# EAGLE board PCBPlates v76 (EAGLE 9.7.0)
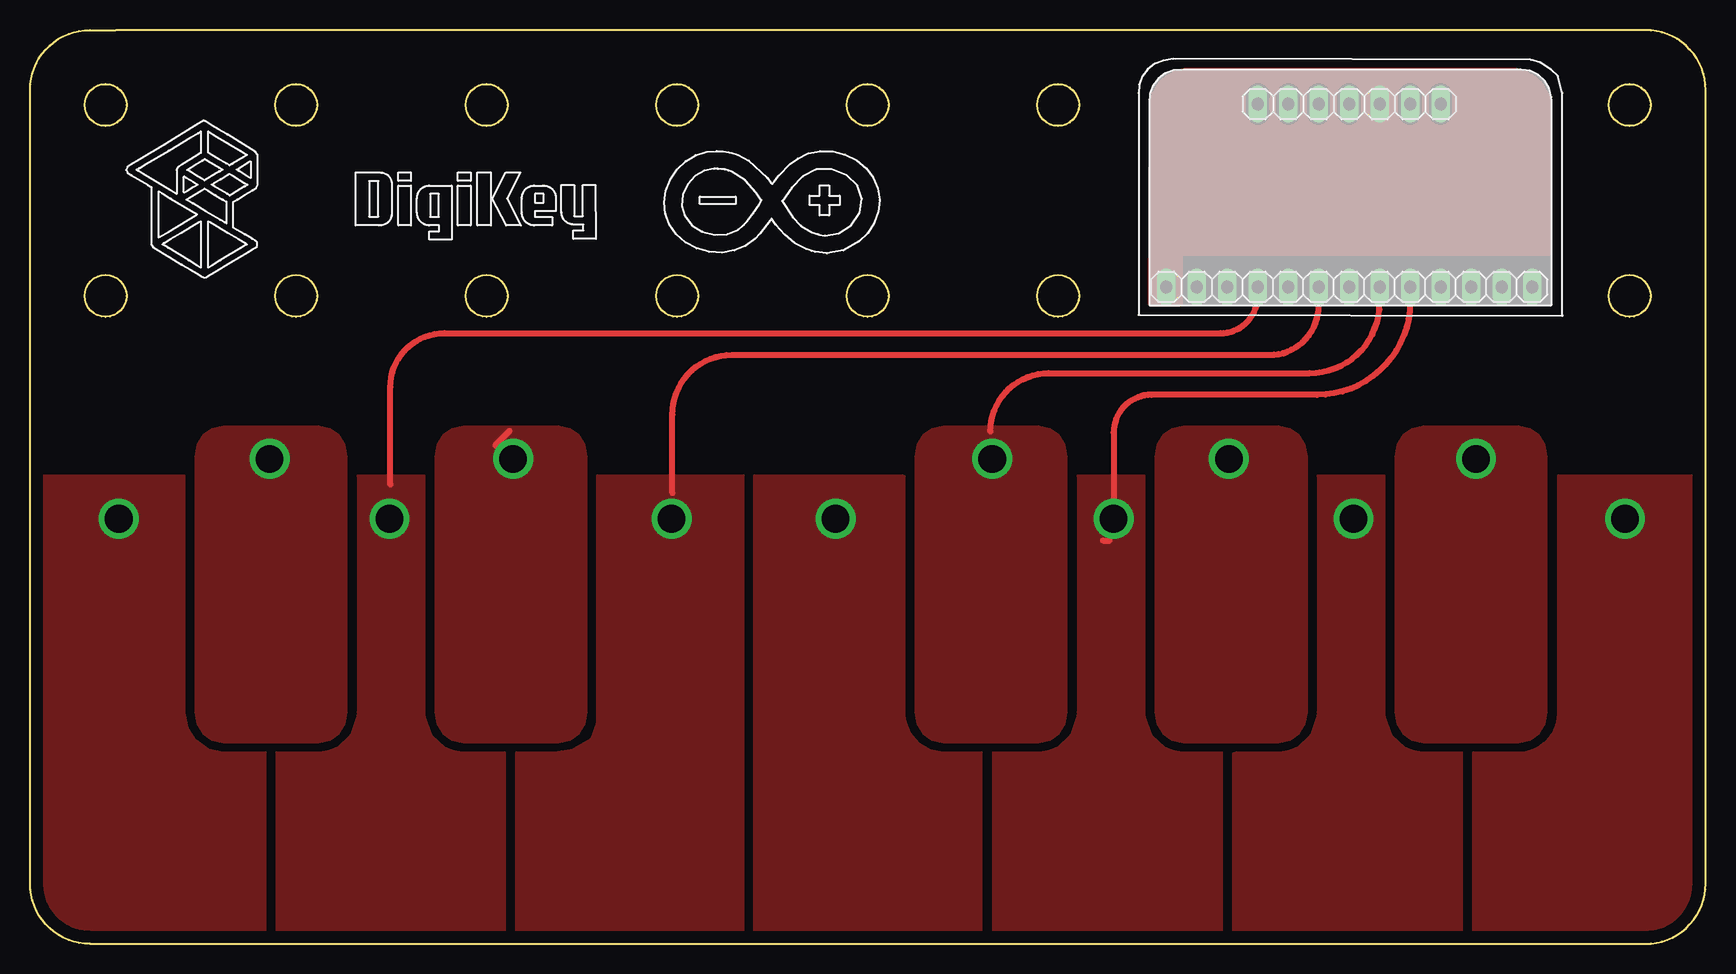
[diagram p0: board, top side]
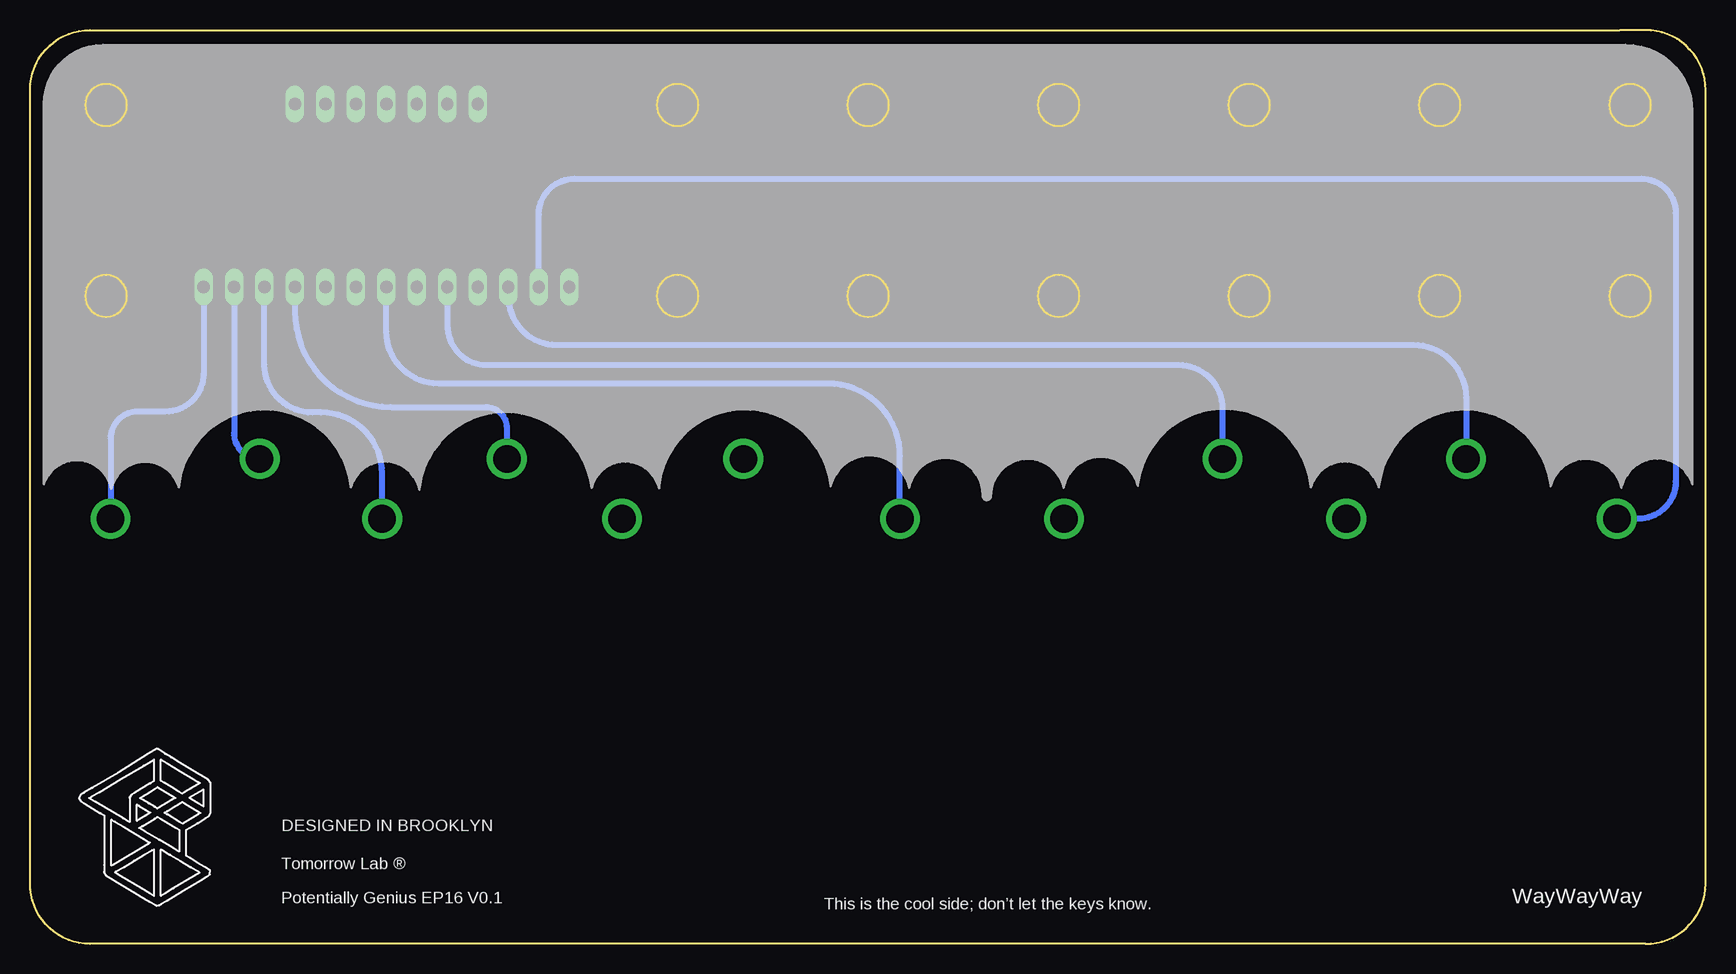
[diagram p1: board, bottom side, seen from below]

Size 139.64 x 76.15 mm. Coordinates in mm from the lower left corner, seen from the top.
Outline: 6.3,52.25 5.95,52.29 5.62,52.39 5.32,52.55 5.07,52.76 4.85,53.02 4.69,53.32 4.59,53.65 4.55,54 4.59,54.35 4.69,54.68 4.85,54.97 5.07,55.23 5.32,55.44 5.62,55.61 5.95,55.71 6.3,55.74 6.65,55.71 6.98,55.61 7.28,55.44 7.53,55.23 7.75,54.97 7.91,54.68 8.01,54.35 8.05,54 8.01,53.65 7.91,53.32 7.75,53.02 7.53,52.76 7.28,52.55 6.98,52.39 6.65,52.29 6.3,52.25
Outline: 6.3,68.16 5.95,68.19 5.62,68.29 5.32,68.46 5.07,68.67 4.85,68.93 4.69,69.22 4.59,69.55 4.55,69.9 4.59,70.26 4.69,70.58 4.85,70.88 5.07,71.14 5.32,71.35 5.62,71.51 5.95,71.61 6.3,71.65 6.65,71.61 6.98,71.51 7.28,71.35 7.53,71.14 7.75,70.88 7.91,70.58 8.01,70.26 8.05,69.9 8.01,69.55 7.91,69.22 7.75,68.93 7.53,68.67 7.28,68.46 6.98,68.29 6.65,68.19 6.3,68.16
Outline: 22.17,52.25 21.82,52.29 21.5,52.39 21.2,52.55 20.94,52.76 20.73,53.02 20.57,53.32 20.46,53.65 20.43,54 20.46,54.35 20.57,54.68 20.73,54.97 20.94,55.23 21.2,55.44 21.5,55.61 21.82,55.71 22.17,55.74 22.53,55.71 22.85,55.61 23.15,55.44 23.41,55.23 23.62,54.97 23.78,54.68 23.89,54.35 23.92,54 23.89,53.65 23.78,53.32 23.62,53.02 23.41,52.76 23.15,52.55 22.85,52.39 22.53,52.29 22.17,52.25
Outline: 22.17,68.16 21.82,68.19 21.5,68.29 21.2,68.46 20.94,68.67 20.73,68.93 20.57,69.22 20.46,69.55 20.43,69.9 20.46,70.26 20.57,70.58 20.73,70.88 20.94,71.14 21.2,71.35 21.5,71.51 21.82,71.61 22.17,71.65 22.53,71.61 22.85,71.51 23.15,71.35 23.41,71.14 23.62,70.88 23.78,70.58 23.89,70.26 23.92,69.9 23.89,69.55 23.78,69.22 23.62,68.93 23.41,68.67 23.15,68.46 22.85,68.29 22.53,68.19 22.17,68.16
Outline: 38.05,52.25 37.7,52.29 37.37,52.39 37.07,52.55 36.82,52.76 36.6,53.02 36.44,53.32 36.34,53.65 36.3,54 36.34,54.35 36.44,54.68 36.6,54.97 36.82,55.23 37.07,55.44 37.37,55.61 37.7,55.71 38.05,55.74 38.4,55.71 38.73,55.61 39.03,55.44 39.28,55.23 39.5,54.97 39.66,54.68 39.76,54.35 39.8,54 39.76,53.65 39.66,53.32 39.5,53.02 39.28,52.76 39.03,52.55 38.73,52.39 38.4,52.29 38.05,52.25
Outline: 38.05,68.16 37.7,68.19 37.37,68.29 37.07,68.46 36.82,68.67 36.6,68.93 36.44,69.22 36.34,69.55 36.3,69.9 36.34,70.26 36.44,70.58 36.6,70.88 36.82,71.14 37.07,71.35 37.37,71.51 37.7,71.61 38.05,71.65 38.4,71.61 38.73,71.51 39.03,71.35 39.28,71.14 39.5,70.88 39.66,70.58 39.76,70.26 39.8,69.9 39.76,69.55 39.66,69.22 39.5,68.93 39.28,68.67 39.03,68.46 38.73,68.29 38.4,68.19 38.05,68.16
Outline: 53.92,52.25 53.57,52.29 53.25,52.39 52.95,52.55 52.69,52.76 52.48,53.02 52.32,53.32 52.21,53.65 52.18,54 52.21,54.35 52.32,54.68 52.48,54.97 52.69,55.23 52.95,55.44 53.25,55.61 53.57,55.71 53.92,55.74 54.28,55.71 54.6,55.61 54.9,55.44 55.16,55.23 55.37,54.97 55.53,54.68 55.64,54.35 55.67,54 55.64,53.65 55.53,53.32 55.37,53.02 55.16,52.76 54.9,52.55 54.6,52.39 54.28,52.29 53.92,52.25
Outline: 53.92,68.16 53.57,68.19 53.25,68.29 52.95,68.46 52.69,68.67 52.48,68.93 52.32,69.22 52.21,69.55 52.18,69.9 52.21,70.26 52.32,70.58 52.48,70.88 52.69,71.14 52.95,71.35 53.25,71.51 53.57,71.61 53.92,71.65 54.28,71.61 54.6,71.51 54.9,71.35 55.16,71.14 55.37,70.88 55.53,70.58 55.64,70.26 55.67,69.9 55.64,69.55 55.53,69.22 55.37,68.93 55.16,68.67 54.9,68.46 54.6,68.29 54.28,68.19 53.92,68.16
Outline: 69.8,52.25 69.45,52.29 69.12,52.39 68.82,52.55 68.57,52.76 68.35,53.02 68.19,53.32 68.09,53.65 68.05,54 68.09,54.35 68.19,54.68 68.35,54.97 68.57,55.23 68.82,55.44 69.12,55.61 69.45,55.71 69.8,55.74 70.15,55.71 70.48,55.61 70.78,55.44 71.03,55.23 71.25,54.97 71.41,54.68 71.51,54.35 71.55,54 71.51,53.65 71.41,53.32 71.25,53.02 71.03,52.76 70.78,52.55 70.48,52.39 70.15,52.29 69.8,52.25
Outline: 69.8,68.16 69.45,68.19 69.12,68.29 68.82,68.46 68.57,68.67 68.35,68.93 68.19,69.22 68.09,69.55 68.05,69.9 68.09,70.26 68.19,70.58 68.35,70.88 68.57,71.14 68.82,71.35 69.12,71.51 69.45,71.61 69.8,71.65 70.15,71.61 70.48,71.51 70.78,71.35 71.03,71.14 71.25,70.88 71.41,70.58 71.51,70.26 71.55,69.9 71.51,69.55 71.41,69.22 71.25,68.93 71.03,68.67 70.78,68.46 70.48,68.29 70.15,68.19 69.8,68.16
Outline: 85.67,52.25 85.32,52.29 85,52.39 84.7,52.55 84.44,52.76 84.23,53.02 84.07,53.32 83.96,53.65 83.93,54 83.96,54.35 84.07,54.68 84.23,54.97 84.44,55.23 84.7,55.44 85,55.61 85.32,55.71 85.67,55.74 86.03,55.71 86.35,55.61 86.65,55.44 86.91,55.23 87.12,54.97 87.28,54.68 87.39,54.35 87.42,54 87.39,53.65 87.28,53.32 87.12,53.02 86.91,52.76 86.65,52.55 86.35,52.39 86.03,52.29 85.67,52.25
Outline: 85.67,68.16 85.32,68.19 85,68.29 84.7,68.46 84.44,68.67 84.23,68.93 84.07,69.22 83.96,69.55 83.93,69.9 83.96,70.26 84.07,70.58 84.23,70.88 84.44,71.14 84.7,71.35 85,71.51 85.32,71.61 85.67,71.65 86.03,71.61 86.35,71.51 86.65,71.35 86.91,71.14 87.12,70.88 87.28,70.58 87.39,70.26 87.42,69.9 87.39,69.55 87.28,69.22 87.12,68.93 86.91,68.67 86.65,68.46 86.35,68.29 86.03,68.19 85.67,68.16
Outline: 133.3,52.25 132.95,52.29 132.62,52.39 132.32,52.55 132.07,52.76 131.85,53.02 131.69,53.32 131.59,53.65 131.55,54 131.59,54.35 131.69,54.68 131.85,54.97 132.07,55.23 132.32,55.44 132.62,55.61 132.95,55.71 133.3,55.74 133.65,55.71 133.98,55.61 134.28,55.44 134.53,55.23 134.75,54.97 134.91,54.68 135.01,54.35 135.05,54 135.01,53.65 134.91,53.32 134.75,53.02 134.53,52.76 134.28,52.55 133.98,52.39 133.65,52.29 133.3,52.25
Outline: 133.3,68.16 132.95,68.19 132.62,68.29 132.32,68.46 132.07,68.67 131.85,68.93 131.69,69.22 131.59,69.55 131.55,69.9 131.59,70.26 131.69,70.58 131.85,70.88 132.07,71.14 132.32,71.35 132.62,71.51 132.95,71.61 133.3,71.65 133.65,71.61 133.98,71.51 134.28,71.35 134.53,71.14 134.75,70.88 134.91,70.58 135.01,70.26 135.05,69.9 135.01,69.55 134.91,69.22 134.75,68.93 134.53,68.67 134.28,68.46 133.98,68.29 133.65,68.19 133.3,68.16
Outline: 5,0 134.64,0 arc90 139.64,5 139.64,71.15 arc90 134.64,76.15 7.15,76.15 5,76.15 arc90 0,71.15 0,5 arc90 5,0
Copper layers (1*16): Top 0.035mm / dielectric 1.5mm / Bottom 0.035mm
Design rules "Fusion Electronics Design Rules": minimum track width 20mil, minimum drill 0.35mm, track to track 8mil, track to pad 8mil, pad to pad 8mil, via to via 8mil, smd to smd 8mil, copper to edge 40mil, drill to drill 6mil, minimum pad ring 10mil, minimum via ring 8mil, stop-mask expansion 4mil, vias tented up to drill 0mil, thermal gap 10mil

## Footprints (pad centres in the part's own frame; a part is rotated, then mirrored left to right if it is on the bottom)
1X13 = drill 1.016 long: 1 -15.24,0; 2 -12.7,0; 3 -10.16,0; 4 -7.62,0; 5 -5.08,0; 6 -2.54,0; 7 0,0; 8 2.54,0; 9 5.08,0; 10 7.62,0; 11 10.16,0; 12 12.7,0; 13 15.24,0
1X07 = drill 1.016 long: 1 -7.62,0; 2 -5.08,0; 3 -2.54,0; 4 0,0; 5 2.54,0; 6 5.08,0; 7 7.62,0

## Placement (x,y rotation side)
JP1  PINHD-1X13  [1X13]  109.93,54.74 180 top
JP2  PINHD-1X7  [1X07]  109.93,69.98 0 top

## Library data of the parts
JP1 JP2 = Connector; CATEGORY: CONNECTOR; SUB-CATEGORY: PIN-HEADER

## Nets
GND: JP1.13 JP2.5
KEY0: JP1.12
KEY1: JP1.11
KEY2: JP1.10
KEY3: JP1.9
KEY4: JP1.8
KEY5: JP1.7
KEY6: JP1.6
KEY7: JP1.5
KEY8: JP1.4
KEY9: JP1.3
KEY10: JP1.2
KEY11: JP1.1

## Tracks (layer width: path | path; a pad name or v marks a point on that pad's centre or on a via)
GND
  pour Top (no thermals): 93.37,53.35 95.84,53.35 95.84,57.38 95.88,57.48 95.95,57.55 96.04,57.59 126.6,57.59 126.6,69.54 126.56,70.01 126.47,70.46 126.31,70.89 126.08,71.29 125.81,71.66 125.48,71.99 125.12,72.26 124.71,72.48 124.28,72.65 123.83,72.74 123.36,72.78 96.71,72.78 96.24,72.74 95.78,72.64 95.34,72.48 94.93,72.26 94.56,71.98 94.23,71.65 93.95,71.27 93.72,70.86 93.56,70.42 93.46,69.97 93.42,69.49 93.42,68.64 93.43,68.64 93.42,68.58 93.42,68.53 93.42,68.53
KEY0  (via drill 2.3)
  Bottom 0.508: JP1.12 97.24,60.79 arc90 94.26,63.76 5.34,63.76 arc90 2.49,60.91 2.49,38.54 arc90 5.6,35.43 v7.4,35.43
  pour Top: 6.3,0.08 19.65,0.08 19.65,15.93 16.1,15.93 16.1,15.93 16.09,15.93 16.08,15.93 16.07,15.93 14.88,16.19 14.88,16.19 14.86,16.19 14.85,16.19 14.85,16.19 14.85,16.19 14.83,16.2 14.82,16.21 14.82,16.21 13.84,16.91 13.83,16.91 13.83,16.91 13.82,16.91 13.82,16.93 13.14,17.97 13.14,17.98 13.14,17.98 13.14,17.98 13.13,18 12.89,19.27 12.89,19.27 12.89,19.28 12.88,19.29 12.89,19.3 12.89,39.02 0.01,39.02 0.01,6.37 0.14,5.1 0.51,3.92 1.09,2.85 1.85,1.92 2.78,1.15 3.85,0.57 5.03,0.2
KEY1  (via drill 2.3)
  Bottom 0.508: JP1.11 99.78,53.93 arc-90 95.76,49.92 24.36,49.92 arc90 19.97,45.52 v19.97,40.42
  pour Top: 16.11,16.8 24.08,16.8 24.99,17 25.73,17.53 26.23,18.32 26.41,19.3 26.41,40.6 26.23,41.58 25.73,42.37 24.99,42.9 24.08,43.09 16.11,43.09 15.19,42.9 14.45,42.37 13.95,41.58 13.76,40.6 13.76,19.3 13.95,18.32 14.45,17.53 15.19,17
KEY2  (via drill 2.3)
  Top 0.508: JP1.10 102.32,54.01 arc-90 99.19,50.88 34.52,50.88 arc90 30.03,46.39 30.03,38.26
  other vias: 29.95,35.43
  pour Top: 20.54,0.08 39.56,0.08 39.59,0.13 39.59,15.93 36.11,15.93 36.1,15.93 36.09,15.93 36.08,15.93 36.08,15.93 35.31,16.03 35.3,16.03 35.29,16.03 35.29,16.03 35.28,16.04 34.57,16.33 34.56,16.34 34.56,16.34 34.56,16.34 34.55,16.35 33.45,17.39 33.45,17.39 33.44,17.4 33.43,17.41 33.43,17.41 33.43,17.41 33.43,17.43 33.42,17.44 33.42,17.44 32.91,18.92 32.9,18.93 32.9,18.94 32.9,18.94 32.9,18.95 32.88,19.29 32.88,19.29 32.88,19.3 32.88,19.32 32.88,19.32 32.88,38.94 32.88,39.02 27.3,39.02 27.29,38.94 27.29,19.32 27.29,19.32 27.29,19.3 27.29,19.29 27.29,19.29 27.28,18.95 27.28,18.94 27.28,18.94 27.28,18.93 27.27,18.92 26.76,17.44 26.76,17.44 26.75,17.43 26.75,17.41 26.75,17.41 26.74,17.41 26.74,17.4 26.73,17.39 26.72,17.39 25.63,16.35 25.62,16.34 25.62,16.34 25.62,16.34 25.6,16.33 24.9,16.04 24.89,16.03 24.89,16.03 24.88,16.03 24.87,16.03 24.1,15.93 24.1,15.93 24.09,15.93 24.08,15.93 24.07,15.93 20.51,15.93 20.51,0.13
KEY3  (via drill 2.3)
  Top 0.508: 39.96,42.72 38.78,41.54
  Bottom 0.508: v40.26,40.42 40.26,44.58 arc-90 43.92,48.24 101.58,48.24 arc90 104.86,51.52 JP1.9
  pour Top: 36.1,16.8 44.08,16.8 44.99,17 45.73,17.53 46.23,18.32 46.42,19.3 46.42,40.6 46.23,41.58 45.73,42.37 44.99,42.9 44.08,43.09 36.1,43.09 35.19,42.9 34.45,42.37 33.95,41.58 33.76,40.6 33.76,19.3 33.95,18.32 34.45,17.53 35.19,17
KEY4  (via drill 2.3)
  Top 0.508: 53.52,37.57 53.52,44.1 arc-90 58.5,49.08 103.31,49.08 arc90 107.4,53.17 JP1.8
  other vias: 53.47,35.43
  pour Top: 40.5,0.05 59.44,0.05 59.49,0.05 59.49,39.02 47.23,39.02 47.23,19.68 47.23,19.68 47.23,19.66 47.23,19.65 47.23,19.65 47.22,18.37 47.22,18.36 47.22,18.36 47.22,18.35 47.22,18.34 46.75,17.1 46.75,17.09 46.75,17.09 46.75,17.08 46.74,17.07 46.73,17.07 46.73,17.06 46.72,17.06 46.71,17.05 45.29,16.2 45.28,16.19 45.28,16.19 45.28,16.19 45.26,16.19 43.74,15.91 43.74,15.9 43.73,15.9 43.72,15.9 43.71,15.9 40.5,15.9
KEY5  (via drill 2.3)
  Bottom 0.508: v67.14,35.43 67.14,40.67 arc-90 73.16,46.69 105.59,46.69 arc90 109.94,51.03 JP1.7
  pour Top: 60.38,0.08 79.32,0.08 79.32,15.93 76.11,15.93 76.1,15.93 76.09,15.93 76.08,15.93 76.08,15.93 75.01,16.13 74.99,16.13 74.99,16.13 74.99,16.13 74.98,16.14 74.07,16.69 74.06,16.7 74.05,16.7 74.05,16.7 74.04,16.71 73.36,17.54 73.35,17.55 73.35,17.55 73.35,17.55 73.34,17.56 72.96,18.6 72.95,18.6 72.95,18.61 72.95,18.62 72.95,18.62 72.89,19.18 72.89,19.19 72.89,19.2 72.89,19.21 72.89,19.21 72.89,19.38 72.89,19.38 72.89,19.39 72.89,19.41 72.89,19.41 72.89,38.97 72.73,39.02 60.33,39.02 60.33,0.08
KEY6  (via drill 2.3)
  Top 0.508: JP1.6 112.48,53.4 arc-90 106.63,47.55 84.89,47.55 arc90 80.04,42.7
  other vias: 80.19,40.42
  pour Top: 76.11,16.8 84.07,16.8 84.99,17 85.73,17.53 86.23,18.32 86.41,19.3 86.41,40.6 86.23,41.58 85.73,42.37 84.99,42.9 84.07,43.09 76.11,43.09 75.19,42.9 74.45,42.37 73.95,41.58 73.76,40.6 73.76,19.3 73.95,18.32 74.45,17.53 75.19,17
KEY7  (via drill 2.3)
  Top 0.508: 89.42,33.6 89.98,33.6 | JP1.5 115.02,53.52 arc-90 107.24,45.75 93.45,45.75 arc90 90.3,42.6 v90.3,35.43
  pour Top: 80.24,0.08 99.33,0.08 99.36,0.13 99.36,15.93 96.11,15.93 96.1,15.93 96.09,15.93 96.08,15.93 96.08,15.93 95.31,16.03 95.3,16.03 95.29,16.03 95.29,16.03 95.28,16.04 94.58,16.33 94.56,16.34 94.56,16.34 94.56,16.34 94.55,16.35 93.45,17.39 93.45,17.39 93.44,17.4 93.43,17.41 93.43,17.41 93.43,17.41 93.43,17.43 93.42,17.44 93.42,17.44 92.91,18.92 92.9,18.93 92.9,18.94 92.9,18.94 92.9,18.95 92.89,19.29 92.88,19.29 92.88,19.3 92.88,19.32 92.88,19.32 92.88,38.94 92.88,39.02 87.3,39.02 87.29,38.94 87.29,19.32 87.29,19.32 87.29,19.3 87.29,19.29 87.29,19.29 87.28,18.95 87.28,18.94 87.28,18.94 87.28,18.93 87.27,18.92 86.76,17.44 86.76,17.44 86.75,17.43 86.75,17.41 86.75,17.41 86.74,17.41 86.74,17.4 86.73,17.39 86.72,17.39 85.63,16.35 85.62,16.34 85.62,16.34 85.62,16.34 85.6,16.33 84.9,16.04 84.89,16.03 84.88,16.03 84.88,16.03 84.87,16.03 84.1,15.93 84.1,15.93 84.09,15.93 84.08,15.93 84.07,15.93 80.21,15.93 80.21,0.13
KEY8  (via drill 2.3)
  Top 0.508: 99.9,41.74 v99.9,40.42
  Bottom 0.508: JP1.4 117.56,52.71 arc-90 109.58,44.73 101.65,44.73 arc90 99.9,42.98 v99.9,40.42
  pour Top: 96.11,16.8 104.08,16.8 104.99,17 105.73,17.53 106.23,18.32 106.42,19.3 106.42,40.6 106.23,41.58 105.73,42.37 104.99,42.9 104.08,43.09 96.1,43.09 95.19,42.9 94.45,42.37 93.95,41.58 93.76,40.6 93.76,19.3 93.95,18.32 94.45,17.53 95.19,17
KEY9  (via drill 2.3)
  Bottom 0.508: JP1.3 120.1,48.27 arc-90 116.11,44.28 115.37,44.28 arc90 110.29,39.2 v110.29,35.43
  pour Top: 100.24,0.08 119.33,0.08 119.36,0.13 119.36,15.93 116.11,15.93 116.1,15.93 116.09,15.93 116.08,15.93 116.08,15.93 115.31,16.03 115.3,16.03 115.29,16.03 115.29,16.03 115.28,16.04 114.58,16.33 114.56,16.34 114.56,16.34 114.56,16.34 114.55,16.35 113.46,17.39 113.45,17.39 113.44,17.4 113.44,17.41 113.43,17.41 113.43,17.41 113.43,17.43 113.42,17.44 113.42,17.44 112.91,18.92 112.9,18.93 112.9,18.94 112.9,18.94 112.9,18.95 112.89,19.29 112.89,19.29 112.89,19.3 112.89,19.32 112.89,19.32 112.89,38.94 112.88,39.02 107.3,39.02 107.3,38.94 107.3,19.32 107.3,19.32 107.3,19.3 107.3,19.29 107.3,19.29 107.28,18.95 107.28,18.94 107.28,18.94 107.28,18.93 107.27,18.92 106.76,17.44 106.76,17.44 106.75,17.43 106.75,17.41 106.75,17.41 106.75,17.41 106.74,17.4 106.73,17.39 106.73,17.39 105.63,16.35 105.62,16.34 105.62,16.34 105.62,16.34 105.61,16.33 104.9,16.04 104.89,16.03 104.89,16.03 104.88,16.03 104.87,16.03 104.1,15.93 104.1,15.93 104.09,15.93 104.08,15.93 104.07,15.93 100.5,15.93 100.21,15.84 100.21,0.13
KEY10  (via drill 2.3)
  Top 0.508: 121.21,40.42 v120.49,40.42
  Bottom 0.508: JP1.2 122.64,42.56 arc-90 v120.49,40.42
  pour Top: 116.1,16.8 124.07,16.8 124.99,17 125.73,17.53 126.23,18.32 126.42,19.3 126.42,40.6 126.23,41.58 125.73,42.37 124.99,42.9 124.07,43.09 116.1,43.09 115.19,42.9 114.45,42.37 113.95,41.58 113.77,40.6 113.77,19.3 113.95,18.32 114.45,17.53 115.19,17
KEY11  (via drill 2.3)
  Bottom 0.508: v132.92,35.43 132.92,42.09 arc90 130.66,44.35 128.32,44.35 arc-90 125.18,47.5 JP1.1
  pour Top: 120.22,0.06 134.96,-0.02 135.52,0.02 136.08,0.13 136.61,0.31 137.12,0.56 137.59,0.87 138.01,1.25 138.38,1.67 138.7,2.14 138.94,2.65 139.13,3.18 139.24,3.73 139.27,4.3 139.34,39.02 127.32,39.02 127.32,19.23 127.32,19.23 127.32,19.22 127.32,19.21 127.32,19.2 127.29,18.77 127.29,18.76 127.29,18.75 127.29,18.74 127.29,18.74 127.19,18.3 127.19,18.3 127.19,18.29 127.19,18.28 127.18,18.27 127.03,17.86 127.03,17.85 127.02,17.84 127.02,17.84 127.02,17.83 126.8,17.44 126.8,17.44 126.8,17.43 126.79,17.42 126.79,17.42 126.52,17.06 126.52,17.06 126.51,17.05 126.51,17.04 126.5,17.04 126.19,16.73 126.19,16.72 126.18,16.72 126.17,16.71 126.17,16.71 125.81,16.44 125.81,16.44 125.8,16.43 125.79,16.43 125.79,16.43 125.4,16.21 125.39,16.21 125.38,16.21 125.38,16.2 125.37,16.2 124.96,16.05 124.95,16.04 124.94,16.04 124.93,16.04 124.93,16.04 124.49,15.94 124.49,15.94 124.48,15.94 124.47,15.94 124.46,15.94 124.02,15.91 124.02,15.91 124.01,15.91 124,15.91 123.99,15.91 120.22,15.91

## Text on the board
bPlace: DESIGNED IN BROOKLYN | Tomorrow Lab ® | WayWayWay | This is the cool side; don’t let the keys know. | Potentially Genius EP16 V0.1
tSilk: MPR121